# Altium PCB PCB1_1.pcbdoc
Units mil, origin at the board's own origin, x right, y up, seen from the top; angles counter-clockwise.
Board outline 1692.91 x 2440.94 mil, 2 copper layers (Top Layer, Bottom Layer), stack 62.206 mil thick; 69 components, 45 nets, 198 pads, 15 vias.
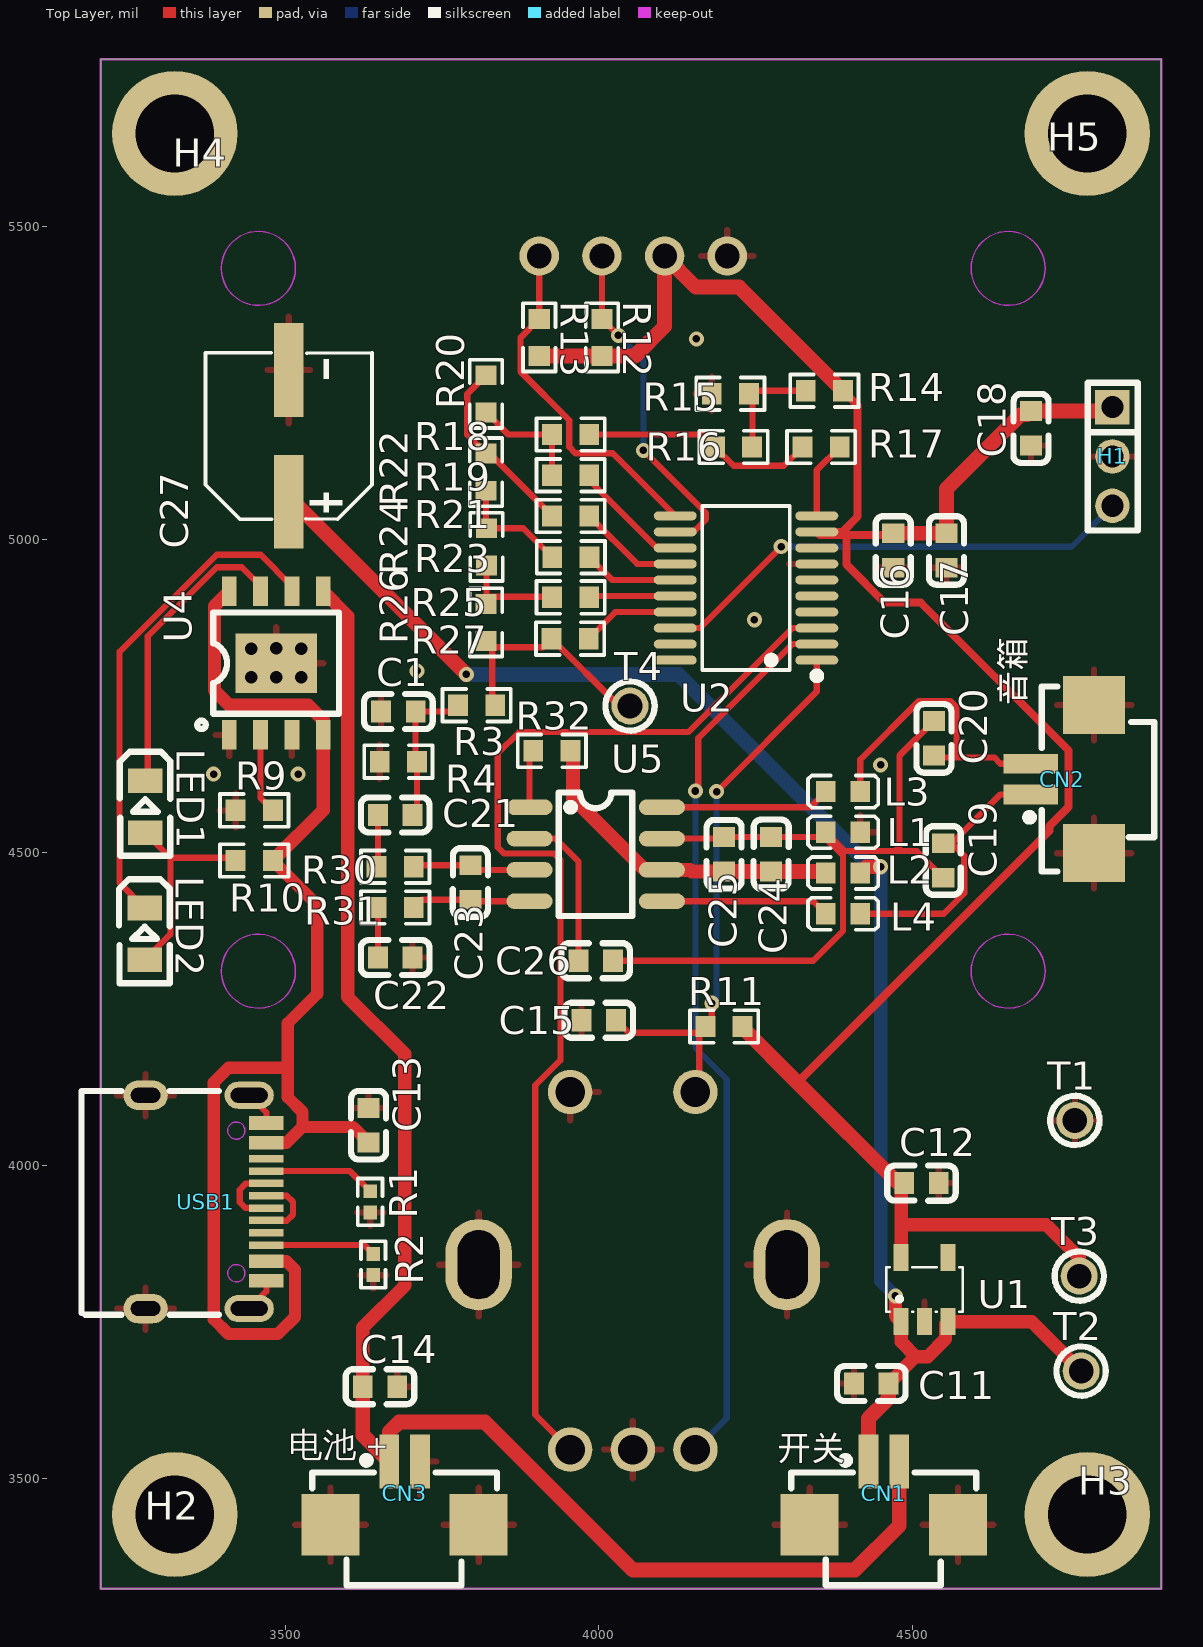
[diagram p0: Top Layer view]
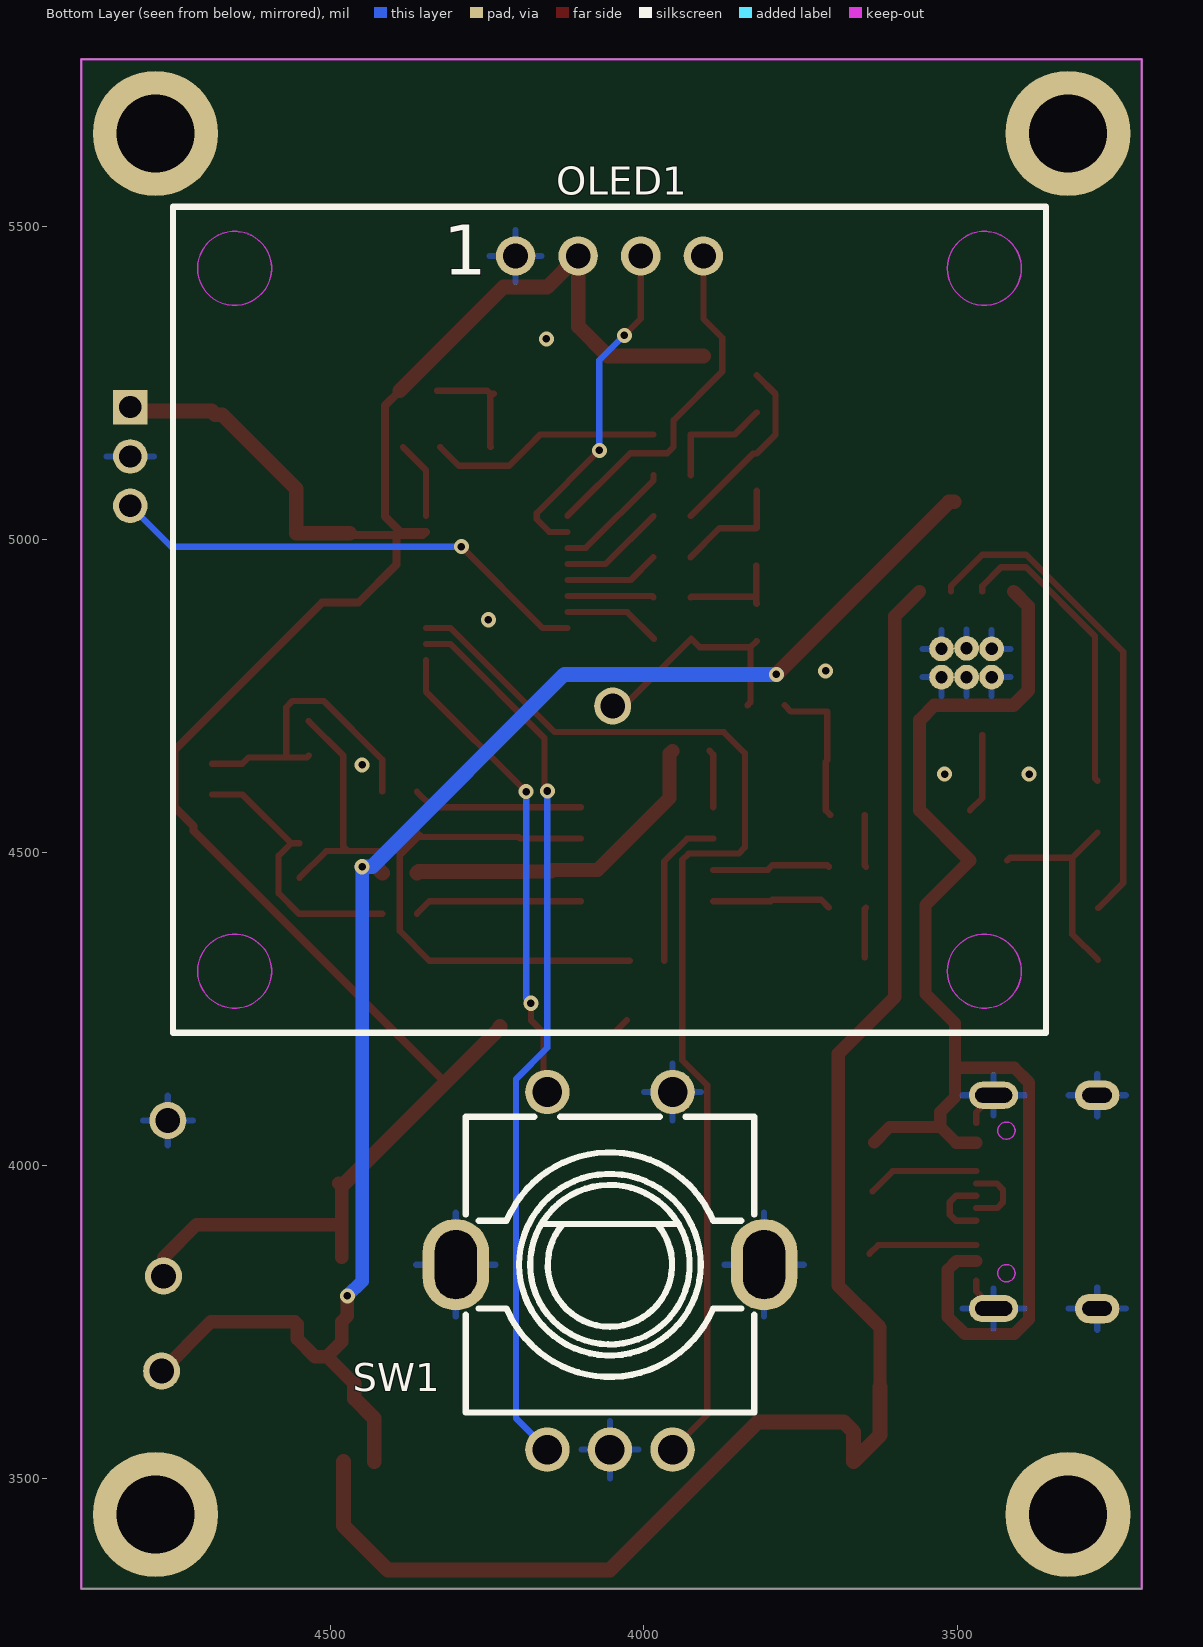
[diagram p1: Bottom Layer view, seen from below]

## Layer stack, top to bottom
Top Solder Mask Layer: solder mask 0.394, Dk 3.3
Top Layer: signal copper 1.379
Dielectric1: surface 59.449, FR4, Dk 4.5
Bottom Layer: signal copper 1.378
Bottom Solder Mask Layer: solder mask 0.394, Dk 3.3

## Board outline
3205,5765.94 4897.91,5765.94 4897.91,3325 3205,3325

## Design rules (kind name [scope] priority, off if disabled: settings)
BoardOutlineClearance copperThickness1oz [All] p0: genericclearance=10 ignorepadtopadclearanceinfootprint=FALSE except(0: Arc-SplitContinuation Track-SplitContinuation SMDPad-SplitContinuation THPad-SplitContinuation Via-SplitContinuation Fill-SplitContinuation Poly-SplitContinuation Region-SplitContinuation Text-SplitContinuation)
BoardOutlineClearance copperThickness2oz [All] p0: genericclearance=10 ignorepadtopadclearanceinfootprint=FALSE except(0: Arc-SplitContinuation Track-SplitContinuation SMDPad-SplitContinuation THPad-SplitContinuation Via-SplitContinuation Fill-SplitContinuation Poly-SplitContinuation Region-SplitContinuation Text-SplitContinuation)
BoardOutlineClearance otherClearance [All] p0: genericclearance=10 ignorepadtopadclearanceinfootprint=FALSE except(0: Arc-SplitContinuation Track-SplitContinuation SMDPad-SplitContinuation THPad-SplitContinuation Via-SplitContinuation Fill-SplitContinuation Poly-SplitContinuation Region-SplitContinuation Text-SplitContinuation)
Clearance copperThickness1oz [All] p1: gap=7 ignorepadtopadclearanceinfootprint=FALSE
Clearance copperThickness2oz [All] p1: gap=7 ignorepadtopadclearanceinfootprint=FALSE
Clearance otherClearance [All] p1: gap=7 ignorepadtopadclearanceinfootprint=FALSE
DiffPairsRouting differentialPair [All] p1: maxuncoupledlength=10 minlimit=6 maxlimit=Infinity mostfreqgap=6 toplayer_minwidth=5 toplayer_prefwidth=10 toplayer_maxwidth=100 bottomlayer_minwidth=5 bottomlayer_prefwidth=10 bottomlayer_maxwidth=100
PasteMaskExpansion pasteMaskExpansion [All] p1: expansion=0
PlaneConnect innerPlane [All] p1: planeconnectstyle=Relief reliefexpansion=20 reliefentries=4 reliefconductorwidth=10 reliefairgap=10
PolygonConnect copperRegion [All] p1: connectstyle=Relief reliefentries=4 reliefconductorwidth=10 polygonreliefangle="90 Angle" airgapwidth=10
RoutingVias viaSize [All] p1: viastyle="Through Hole" holewidth=12.0078 minholewidth=11.811 maxholewidth=248.0314 width=12.0078 minwidth=11.811 maxwidth=248.0314
SolderMaskExpansion solderMaskExpansion [IsVia] p1: useseparateexpansions=TRUE expansion=-1000 expansionbottom=-1000
SolderMaskExpansion solderMaskExpansion [All] p2: useseparateexpansions=TRUE expansion=2 expansionbottom=2
Width copperThickness1oz [All] p1: maxlimit=100 minlimit=5 preferedwidth=10
Width copperThickness2oz [All] p1: maxlimit=100 minlimit=10 preferedwidth=24

## Components (designator, comment, footprint, x,y, rotation, side; value= is the part's Value field where it differs from the comment)
C1 "100nF" C0603 3680,4725 r0 top
C11 "1μF" C0603 4435,3652.2 r0 top
C12 "1μF" C0603 4515,3972.2 r180 top
C13 "1μF" C0603 3632.44,4064.64 r270 top
C14 "1μF" C0603 3650.63,3647.2 r180 top
C15 "100nF" C0603 4000,4232.2 r0 top
C16 "100nF" C0603 4470,4982.2 r90 top
C17 "100nF" C0603 4555,4982.2 r90 top
C18 "100nF" C0603_1 4690,5177.2 r90 top
C19 "1nF" C0402 4550,4487.2 r90 top
C20 "1nF" C0402 4535,4682.2 r270 top
C21 "100nF" C0603 3675,4560 r180 top
C22 "100nF" C0603 3675,4332.2 r180 top
C23 "22pF" C0402_2 3795,4452.2 r90 top
C24 "22uF" C0603_1 4275,4497.2 r270 top
C25 "100nF" C0603 4200,4497.2 r90 top
C26 "100nF" C0603 3995,4327.2 r180 top
C27 "100UF" CAP-SMD_BD6.3-L6.6-W6.6-FD-1 3505,5165 r90 top
CN1 "HC-1.25-2PWT" CONN-SMD_2P-P1.25-HC-1.25-2PWT 4455,3477.2 r0 top
CN2 "HC-1.25-2PWT" CONN-SMD_2P-P1.25-HC-1.25-2PWT 4740,4617.2 r90 top
CN3 "HC-1.25-2PWT" CONN-SMD_2P-P1.25-HC-1.25-2PWT 3690,3477.2 r0 top
H1 "PZ200V-11-03P" HDR-TH_3P-P2.00-V-M 4820,5132.2 r270 top
H2 "M3" ? 3333.11,3443.11 r0 top
H3 "M3" ? 4789.8,3443.11 r0 top
H4 "M3" ? 3333.11,5647.83 r0 top
H5 "M3" ? 4789.8,5647.83 r0 top
L1 "BLM18PG121SN1D" L0603 4390,4532.2 r0 top
L2 "BLM18PG121SN1D" L0603 4390,4467.2 r0 top
L3 "BLM18PG121SN1D" L0603 4390,4597.2 r0 top
L4 "BLM18PG121SN1D" L0603 4390,4402.2 r0 top
LED1 "RED" LED0805-R-RD 3276.1,4573.1 r270 top
LED2 "GREEN" LED0805-R-RD 3275,4369.9 r270 top
OLED1 "HS13L03W2C01" OLED-TH_L35.4-W33.5_HS13L03W2C01 4055,5452.2 r180 bottom locked
R1 "5.1kΩ" R0402 3635,3942.2 r90 top
R2 "5.1kΩ" R0402 3640,3842.2 r90 top
R3 "10K" R0603 3805,4735 r180 top
R4 "2.1K" R0603 3680,4645 r0 top
R9 "1.2kΩ" R0603 3450,4567.2 r180 top
R10 "1K" R0603 3450,4487.2 r180 top
R11 "10K" R0603 4200,4222.2 r0 top
R12 "10K" R0603 4005,5322.2 r270 top
R13 "10K" R0603 3905,5322.2 r270 top
R14 "10K" R0603 4360,5237.2 r0 top
R15 "10K" R0603 4210,5232.2 r0 top
R16 "10K" R0603 4215,5147.2 r180 top locked
R17 "10K" R0603 4355,5147.2 r0 top locked
R18 "10K" R0603 3955,5167.2 r180 top locked
R19 "10K" R0603 3955,5102.2 r0 top locked
R20 "10K" R0603 3820,5232.2 r90 top locked
R21 "10K" R0603 3955,5037.2 r0 top locked
R22 "10K" R0603 3820,5107.2 r90 top locked
R23 "10K" R0603 3955.32,4971.35 r180 top locked
R24 "10K" R0603 3820.63,4987.88 r270 top locked
R25 "10K" R0603 3955,4907.2 r0 top locked
R26 "10K" R0603 3820,4867.2 r90 top locked
R27 "10K" R0603 3954.31,4841.35 r0 top locked
R30 "30kΩ" R0603 3675,4477.2 r180 top
R31 "30kΩ" R0603 3675,4412.2 r180 top
R32 "10K" R0603 3925,4662.2 r0 top
SW1 "EC11E1834403" SW-TH_EC11E1820402 4054.27,3832.2 r180 bottom locked
T1 "GND" TP-TH-1.5mm 4760,4072.2 r0 top
T2 "GND" TP-TH-1.5mm 4770,3672.2 r0 top
T3 "GND" TP-TH-1.5mm 4766.93,3823.78 r0 top
T4 "GND" TP-TH-1.5mm 4049.84,4733.79 r0 top
U1 "ME6217C33M5G" SOT-23-5_L3.0-W1.7-P0.95-LS2.8-BR 4520,3802.2 r270 top
U2 "CH32V003F4P6" TSSOP-20_L6.5-W4.4-P0.65-LS6.4-BL 4235,4922.2 r90 top locked
U4 "TP4056" ESOP-8_L4.9-W3.9-P1.27-LS6.0-BL-EP 3485,4802.2 r0 top
U5 "NS4150C" SOP-8_L4.9-W3.9-P1.27-LS6.0-BL 3995,4497.2 r270 top
USB1 "TYPE-C 16PIN 2MD(073)" USB-C-SMD_TYPE-C-6PIN-2MD-073_EX 3370,3942.2 r270 top

## Footprints (in the part's own frame and the unit in brackets; to place one, negate y for a bottom-side part, rotate by r counter-clockwise, add the part's x,y. Pads: shape width x height; smd on the part's side, far side on the other; paste and mask are expansions set on the pad)
C0402 [mm]
  rect 0.8x0.9 smd: 1(-0.7,0) 2(0.7,0)
  silkscreen extent -1.39,-0.71 1.39,0.71
C0402_2 [mm]
  rect 0.8x0.9 smd: 1(-0.7,0) 2(0.7,0)
  silkscreen extent -1.39,-0.71 1.39,0.71
C0603 [mm]
  rect 0.8x0.9 smd: 1(-0.7,0) 2(0.7,0)
  silkscreen extent -1.39,-0.71 1.39,0.71
C0603_1 [mm]
  rect 0.8x0.9 smd: 1(-0.7,0) 2(0.7,0)
  silkscreen extent -1.41,-0.71 1.39,0.72
CAP-SMD_BD6.3-L6.6-W6.6-FD-1 [mm]
  rect 3.8x1.2 smd: 1(-2.67,0) 2(2.67,0)
  silkscreen extent -3.38,-3.38 3.38,3.38
CONN-SMD_2P-P1.25-HC-1.25-2PWT [mm]
  rect 0.8x2.2 smd paste+0 mask+0.05: 1(-0.625,1.285) 2(0.625,1.285)
  rect 2.35x2.5 smd paste+0 mask+0.05: 3(-3.005,-1.285) 4(3.005,-1.285)
  silkscreen extent -3.75,-3.73 3.75,1.48
ESOP-8_L4.9-W3.9-P1.27-LS6.0-BL-EP [mm]
  rect 0.6x1.2 smd: 1(-1.905,-2.908) 2(-0.635,-2.908) 3(0.635,-2.908) 4(1.905,-2.908) 5(1.905,2.908) 6(0.635,2.908) 7(-0.635,2.908) 8(-1.905,2.908)
  rect 3.3x2.4 smd: 9(0,0)
  silkscreen extent -3.2,-2.67 2.55,2.05
HDR-TH_3P-P2.00-V-M [mm]
  rect 1.4x1.4 hole 0.9: 1(-2,0)
  round 1.4 hole 0.9: 2(0,0) 3(2,0)
  silkscreen extent -2.99,-1 3,1.03
L0603 [mm]
  rect 0.8x0.864 smd paste-100 mask+0.051: 1(-0.7,0) 2(0.7,0)
  silkscreen extent -1.42,-0.65 1.42,0.65
LED0805-R-RD [mm]
  rect 1x1.4 smd: 1(1.05,0) 2(-1.05,0)
  silkscreen extent -2.22,-1.04 1.99,1.01
OLED-TH_L35.4-W33.5_HS13L03W2C01 [mm]
  round 1.6 hole 1: 1(-3.81,0) 2(-1.27,0) 3(1.27,0) 4(3.81,0)
  Board Outline Layer circle w0.003: c-15.2,-0.5 r1.5
  Board Outline Layer circle w0.003: c15.2,-0.5 r1.5
  Board Outline Layer circle w0.003: c-15.2,-29 r1.5
  Board Outline Layer circle w0.003: c15.2,-29 r1.5
  Board Outline Layer region: -16.7,-0.5 -16.551,-1.151 -16.135,-1.673 -15.534,-1.963 -14.866,-1.963 -14.265,-1.673 -13.848,-1.151 -13.7,-0.5 -13.7,-0.5 -13.848,0.151 -14.265,0.673 -14.866,0.962 -15.534,0.962 -16.135,0.673 -16.551,0.151 -16.7,-0.5
  Board Outline Layer region: -16.7,-0.5 -16.551,-1.151 -16.135,-1.673 -15.534,-1.963 -14.866,-1.963 -14.265,-1.673 -13.848,-1.151 -13.7,-0.5 -13.7,-0.5 -13.848,0.151 -14.265,0.673 -14.866,0.962 -15.534,0.962 -16.135,0.673 -16.551,0.151 -16.7,-0.5
  Board Outline Layer region: 13.7,-0.5 13.848,-1.151 14.265,-1.673 14.866,-1.963 15.534,-1.963 16.135,-1.673 16.551,-1.151 16.7,-0.5 16.7,-0.5 16.551,0.151 16.135,0.673 15.534,0.962 14.866,0.962 14.265,0.673 13.848,0.151 13.7,-0.5
  Board Outline Layer region: 13.7,-0.5 13.848,-1.151 14.265,-1.673 14.866,-1.963 15.534,-1.963 16.135,-1.673 16.551,-1.151 16.7,-0.5 16.7,-0.5 16.551,0.151 16.135,0.673 15.534,0.962 14.866,0.962 14.265,0.673 13.848,0.151 13.7,-0.5
  Board Outline Layer region: -16.7,-29 -16.551,-29.651 -16.135,-30.173 -15.534,-30.462 -14.866,-30.462 -14.265,-30.173 -13.848,-29.651 -13.7,-29 -13.7,-29 -13.848,-28.349 -14.265,-27.827 -14.866,-27.538 -15.534,-27.538 -16.135,-27.827 -16.551,-28.349 -16.7,-29
  Board Outline Layer region: -16.7,-29 -16.551,-29.651 -16.135,-30.173 -15.534,-30.462 -14.866,-30.462 -14.265,-30.173 -13.848,-29.651 -13.7,-29 -13.7,-29 -13.848,-28.349 -14.265,-27.827 -14.866,-27.538 -15.534,-27.538 -16.135,-27.827 -16.551,-28.349 -16.7,-29
  Board Outline Layer region: 13.7,-29 13.848,-29.651 14.265,-30.173 14.866,-30.462 15.534,-30.462 16.135,-30.173 16.551,-29.651 16.7,-29 16.7,-29 16.551,-28.349 16.135,-27.827 15.534,-27.538 14.866,-27.538 14.265,-27.827 13.848,-28.349 13.7,-29
  Board Outline Layer region: 13.7,-29 13.848,-29.651 14.265,-30.173 14.866,-30.462 15.534,-30.462 16.135,-30.173 16.551,-29.651 16.7,-29 16.7,-29 16.551,-28.349 16.135,-27.827 15.534,-27.538 14.866,-27.538 14.265,-27.827 13.848,-28.349 13.7,-29
  silkscreen extent -17.7,-31.5 17.7,2
R0402 [mm]
  rect 0.566x0.54 smd paste-100 mask+0.051: 1(-0.433,0) 2(0.433,0)
  silkscreen extent -0.94,-0.5 0.94,0.5
R0603 [mil]
  rect 31.75x34.02 smd paste-3937.01 mask+2: 1(-29.66,0) 2(29.66,0)
  silkscreen extent -55,-26 55,26
SOP-8_L4.9-W3.9-P1.27-LS6.0-BL [mm]
  oval 0.63x1.865 smd: 1(-1.905,-2.682) 2(-0.635,-2.682) 3(0.635,-2.682) 4(1.905,-2.682) 5(1.905,2.682) 6(0.635,2.682) 7(-0.635,2.682) 8(-1.905,2.682)
  silkscreen extent -2.5,-1.5 2.5,1.48
SOT-23-5_L3.0-W1.7-P0.95-LS2.8-BR [mm]
  rect 1.1x0.6 smd: 1(1.3,-0.95) 2(1.3,0) 3(1.3,0.95) 4(-1.3,0.95) 5(-1.3,-0.95)
  silkscreen extent -0.9,-1.55 0.9,1.55
SW-TH_EC11E1820402 [mm]
  round 1.8 hole 1.2: A(-2.54,-7.25) B(2.54,-7.25) C(0,-7.25) D(-2.54,7.25) E(2.54,7.25)
  oval 2.7x3.7 hole 1.7 slot 2.8 at 90 deg: F(6.25,0.25) G(-6.25,0.25)
  silkscreen extent -5.85,-5.75 5.85,6.25
TP-TH-1.5mm [mm]
  round 1.5 hole 1: 1(0,0)
  silkscreen extent -1,-1 1,1
TSSOP-20_L6.5-W4.4-P0.65-LS6.4-BL [mil]
  oval 14.33x68.58 smd: 1(-115.16,-113.03) 2(-89.57,-113.03) 3(-63.98,-113.03) 4(-38.39,-113.03) 5(-12.79,-113.03) 6(12.8,-113.03) 7(38.39,-113.03) 8(63.98,-113.03) 9(89.57,-113.03) 10(115.16,-113.03) 11(115.16,113.03) 12(89.57,113.03) 13(63.98,113.03) 14(38.39,113.03) 15(12.8,113.03) 16(-12.79,113.03) 17(-38.39,113.03) 18(-63.98,113.03) 19(-89.57,113.03) 20(-115.16,113.03)
  silkscreen extent -146,-119 131,70
USB-C-SMD_TYPE-C-6PIN-2MD-073_EX [mm]
  rect 0.55x1.4 smd paste-100 mask+0.05: 1(-3.2,2.523) 2(-2.4,2.523) 11(2.4,2.523) 12(3.2,2.523)
  rect 0.3x1.4 smd paste-100 mask+0.05: 3(-1.75,2.523) 4(-1.25,2.523) 5(-0.75,2.523) 6(-0.25,2.523) 7(0.25,2.523) 8(0.75,2.523) 9(1.25,2.523) 10(1.75,2.523)
  oval 1.2x1.8 hole 0.6 slot 1.2 at 90 deg paste+0 mask+0.05: 13(-4.325,-2.375) 14(4.325,-2.375)
  oval 1.1x2 hole 0.6 slot 1.5 at 90 deg paste+0 mask+0.05: 13(-4.325,1.825) 14(4.325,1.825)
  Board Outline Layer circle w0.003: c-2.89,1.305 r0.35
  Board Outline Layer circle w0.003: c2.89,1.305 r0.35
  Board Outline Layer region: -2.89,1.655 -2.738,1.62 -2.616,1.523 -2.549,1.383 -2.549,1.227 -2.616,1.087 -2.738,0.99 -2.89,0.955 -2.89,0.955 -3.042,0.99 -3.164,1.087 -3.231,1.227 -3.231,1.383 -3.164,1.523 -3.042,1.62 -2.89,1.655
  Board Outline Layer region: -2.89,1.655 -2.738,1.62 -2.616,1.523 -2.549,1.383 -2.549,1.227 -2.616,1.087 -2.738,0.99 -2.89,0.955 -2.89,0.955 -3.042,0.99 -3.164,1.087 -3.231,1.227 -3.231,1.383 -3.164,1.523 -3.042,1.62 -2.89,1.655
  Board Outline Layer region: 2.89,1.655 3.042,1.62 3.164,1.523 3.231,1.383 3.231,1.227 3.164,1.087 3.042,0.99 2.89,0.955 2.89,0.955 2.738,0.99 2.616,1.087 2.549,1.227 2.549,1.383 2.616,1.523 2.738,1.62 2.89,1.655
  Board Outline Layer region: 2.89,1.655 3.042,1.62 3.164,1.523 3.231,1.383 3.231,1.227 3.164,1.087 3.042,0.99 2.89,0.955 2.89,0.955 2.738,0.99 2.616,1.087 2.549,1.227 2.549,1.383 2.616,1.523 2.738,1.62 2.89,1.655
  silkscreen extent -4.5,-4.97 4.57,0.6
? [mil]
  round 200 hole 125: 1(-10,0)

## Free pads (board coordinates)
  round 39.37 hole 19.68: 1(3445,4780) 1(3445,4825) 1(3485,4780) 1(3485,4825.85) 1(3525,4780) 1(3525,4825)

## Via types
v1: diameter 24.02, hole 12.01, Top Layer to Bottom Layer, 15 vias

## Nets (pads, with @x,y where several pads share a name; then routed paths per layer and width w, separated by ;. In a path a pad name is that pad's centre, name@x,y a point inside that pad or via, vN(x,y) a via of type N, cw(c..) or ccw(c..) an arc to the next point about the centre after c; other vN are vias at no path point)
3V3: C12.2 C16.2 C17.2 C18.2 H1.1 OLED1.2 R11.2 R12.2 R13.2 R14.2 T3.1 U1.5 U2.9 | length 3641.6
  Top Layer w12.9: 4317.24,4132.72 4719.23,4534.7 4719.23,4542.19 4749.6,4572.56 4749.6,4663.12 4514,4898.73 4456.03,4898.73 4395.27,4959.49 4395.27,5006.73 ; R14.2 4413.28,5213.58 4413.28,5036.29 4388.77,5011.78 U2.9 4353.08,5006.73 4395.27,5006.73 ; C16.2 4466.96,5006.73 4395.27,5006.73
  Top Layer w21.26: U1.5 4482.6,3905.65 ; C12.2 4482.6,3967.36 4482.6,3905.65 ; T3.1 4766.93,3853.07 4714.35,3905.65 4482.6,3905.65
  Top Layer w23.62: R13.2 R12.2 4057.76,5292.54 4105,5339.79 OLED1.2 4154.65,5402.56 4224.31,5402.56 R14.2 ; R11.2 4229.66,4220.3 4317.24,4132.72 C12.2@4482.6,3967.36 ; C16.2 C17.2 4555,5080.63 4673.11,5198.74 4683.98,5198.74 C18.2 4813.82,5204.77 H1.1
$1N33: R14.1 R15.2 R16.1 | length 178
  Top Layer w10: R15.2 R15.2@4245.34,5232.21 ; R16.1 4245.34,5147.88 R15.2@4245.34,5232.21 ; R14.1 4250.34,5237.21 R15.2@4245.34,5232.21
$1N35: R16.2 R17.1 R18.1 | length 373.8
  Top Layer w10: R18.1 4165.34,5167.21 R16.2 4215.34,5117.21 4295.34,5117.21 R17.1
$1N36: R18.2 R19.1 R20.1 | length 185
  Top Layer w10: R20.1 3855.34,5167.21 R18.2 R19.1
$1N37: R20.2 R21.1 R22.2 | length 296.5
  Top Layer w10: R20.2 3790,5231.87 3790,5166.87 R22.2 3825.68,5136.87 R21.1
$1N38: R22.1 R23.2 R24.1 | length 184.4
  Top Layer w10: R22.1 3820,5018.17 R24.1 3879.46,5017.55 R23.2
$1N39: R24.2 R25.1 R26.2 | length 166.7
  Top Layer w10: R26.2 3820.63,4897.49 R26.2@3820.63,4908.22 ; R24.2 R26.2@3820.63,4908.22 ; R25.1 3924.32,4908.22 R26.2@3820.63,4908.22
$2N8: R1.2 USB1.4 | length 179
  Top Layer w10: USB1.4 3602.84,3991.41 R1.2
$2N12: R2.2 USB1.10 | length 176.5
  Top Layer w10: USB1.10 3625.95,3873.3 R2.2
$2N44: LED1.1 LED2.1 R10.2 | length 342.9
  Top Layer w10: LED2.1 3316.1,4369.65 3316.1,4491.75 ; LED1.1 3316.1,4491.75 ; R10.2 3415.79,4491.75 3316.1,4491.75
$2N47: LED1.2 U4.7 | length 479.1
  Top Layer w10: LED1.2 3280,4618.36 3280,4845.32 3390,4955.32 3430,4955.32 3460,4925.32 U4.7
$2N48: LED2.2 U4.6 | length 794.2
  Top Layer w10: LED2.2 3235,4451.25 3235,4820.32 3390,4975.32 3460,4975.32 3510,4925.32 U4.6
$2N50: R9.1 U4.2 | length 128.6
  Top Layer w10: U4.2 3460,4586.86 R9.1
$2N54: C20.2 CN2.2 L3.2 | length 487.2
  Top Layer w10: L3.2 4417.55,4648.26 4511.1,4741.81 4561.1,4741.81 4571.1,4731.81 4571.1,4651.81 ; C20.2 4537.83,4651.81 4571.1,4651.81 ; CN2.2 4641.1,4641.81 4631.1,4651.81 4571.1,4651.81
$2N55: C19.2 CN2.1 L4.2 | length 439.1
  Top Layer w10: L4.2 4550.71,4402.2 4583.27,4434.76 4583.27,4494.76 C19.2@4563.27,4514.76 ; C19.2 C19.2@4563.27,4514.76 ; CN2.1 4641.1,4592.6 C19.2@4563.27,4514.76
$2N58: L3.1 U5.8 | length 272.2
  Top Layer w10: U5.8 4337.44,4572.2 L3.1
$2N60: L4.1 U5.5 | length 270.1
  Top Layer w10: U5.5 4342.44,4422.2 L4.1
$2N62: C23.1 R31.1 U5.4 | length 190.9
  Top Layer w10: R31.1 3717.1,4424.64 C23.1 3797.44,4422.2 U5.4
$2N63: C23.2 R30.1 U5.3 | length 188.9
  Top Layer w10: R30.1 3707.22,4479.76 C23.2 3802.56,4472.2 U5.3
$2N67: C1.2 C21.1 R3.2 R4.2 | length 240.7
  Top Layer w10: C21.1 3709.66,4567.1 R4.2 3707.56,4647.1 C1.2 3765.34,4725 R3.2
$2N68: C22.2 R31.2 | length 80.9
  Top Layer w10: R31.2 3647.44,4410.1 C22.2
$2N69: C21.2 R30.2 | length 83.7
  Top Layer w10: R30.2 3647.44,4479.31 C21.2
$2N80: C26.2 U5.2 | length 251.7
  Top Layer w10: U5.2 3931.01,4522.2 3967.44,4485.77 C26.2
$2N81: R32.1 U5.1 | length 92.5
  Top Layer w10: U5.1 3889.39,4656.25 R32.1
A: SW1.A U2.2 | length 1430.6
  Top Layer w10: v1(4154.27,4598.16) 4158.74,4602.64 4158.74,4682.64 4308.74,4832.64 U2.2
  Bottom Layer w10: SW1.A 4204.27,3596.77 4204.27,4138.17 4154.27,4188.16 v1(4154.27,4598.16)
AU_GND: C19.1 C20.1 C24.1 C25.2 C26.1 L1.1 U5.7 | length 1271.6
  Top Layer w10: C26.1 4342.44,4327.2 4390,4374.76 4390,4494.76 4360,4524.76 L1.1@4355,4524.76 ; U5.7 4197.44,4522.2 C25.2 C24.1 L1.1@4355,4524.76 ; C20.1 4480,4654.76 4480,4509.76 4472.44,4502.2 ; C19.1 4507.44,4502.2 4472.44,4502.2 ; L1.1@4355,4524.76 L1.1 4392.44,4502.2 4472.44,4502.2
B: SW1.B U2.3 | length 1831.4
  Top Layer w10: SW1.B 3898.74,3602.3 3898.74,4128.23 3938.74,4168.23 3938.74,4488.23 3928.74,4498.23 3848.74,4498.23 3838.74,4508.23 3838.74,4658.23 3872.72,4692.2 4142.72,4692.2 4308.74,4858.23 U2.3
BAT-IN: C14.2 CN1.2 CN3.1 U4.5 | length 2585.5
  Top Layer w21.26: U4.5 3599.45,4877.25 3599.45,4269.25 3690,4178.7 3690,3808.62 3623.07,3741.69 C14.2
  Top Layer w23.62: C14.2 3623.07,3570.12 CN3.1 3665.39,3575.04 3681.14,3590.79 3818.19,3590.79 4054.41,3354.57 4408.74,3354.57 4479.61,3425.43 CN1.2
BIT0: R17.2 U2.10 | length 125
  Top Layer w10: U2.10 4348.03,5110.58 R17.2
BIT1: R19.2 U2.13 | length 190.1
  Top Layer w10: R19.2 3984.66,5094.2 4092.68,4986.19 U2.13
BIT2: R21.2 U2.14 | length 169
  Top Layer w10: R21.2 4061.27,4960.6 U2.14
BIT3: R23.1 U2.15 | length 152
  Top Layer w10: R23.1 4021.32,4935.01 U2.15
BIT4: R25.2 U2.16 | length 138.2
  Top Layer w10: R25.2 3986.87,4909.42 U2.16
BIT5: R27.2 U2.17 | length 155.6
  Top Layer w10: R27.2 4026.44,4883.82 U2.17
D: C15.2 R11.1 SW1.D U2.1 | length 910.7
  Top Layer w10: C15.2 4047.56,4212.2 R11.1@4160.34,4212.2 ; SW1.D 4160.34,4123.71 R11.1@4160.34,4212.2 ; v1(4180.34,4259.35) 4180.34,4232.2 R11.1 R11.1@4160.34,4212.2 ; v1(4188.03,4597.05) 4348.03,4757.05 U2.1
  Bottom Layer w10: v1(4180.34,4259.35) 4188.03,4267.05 v1(4188.03,4597.05)
D+: USB1.6 USB1.8 | length 113.7
  Top Layer w10: USB1.8 3469.96,3912.05 3501.89,3912.05 3511.89,3922.05 3511.89,3942.05 3501.89,3952.05 USB1.6@3469.33,3952.05
D-: USB1.5 USB1.7 | length 113.1
  Top Layer w10: USB1.7 3436.14,3932.36 3426.77,3941.73 3426.77,3961.73 3436.77,3971.73 USB1.5
DAC: R3.1 R26.1 R27.1 T4.1 | length 378.7
  Top Layer w10: R26.1 R26.1@3830,4827.54 ; R3.1 3830,4739.66 R26.1@3830,4827.54 ; T4.1 4032.2,4733.79 R27.1 3910.84,4827.54 R26.1@3830,4827.54
DIO: H1.3 U2.18 | length 778.9
  Top Layer w10: U2.18 4161.26,4858.23 v1(4291.26,4988.23)
  Bottom Layer w10: v1(4291.26,4988.23) 4754.76,4988.23 H1.3
GND: C1.1 C11.1 C12.1 C13.1 C14.1 C15.1 C16.1 C17.1 C18.1 C22.1 C27.2 CN1.3 CN1.4 CN2.3 CN2.4 CN3.2 CN3.3 CN3.4 H1.2 L1.2 OLED1.1 pad.1 R1.1 R2.1 R4.1 R9.2 R15.1 SW1.C SW1.E SW1.F SW1.G T1.1 U1.2 U2.7 U4.1 U4.3 U4.9 USB1.1 USB1.12 USB1.13 USB1.14 | length 111.3
  Top Layer w10: USB1.14@3441.86,3771.93 3469.33,3799.41 USB1.12 ; USB1.13@3441.86,4112.48 3469.33,4085 USB1.1
  other v1: 3385,4625 3520,4625 4450,4640 3710,4790 4248.35,4871.5 4155.63,5320
SCL: OLED1.3 R12.1 U2.12 | length 546.9
  Top Layer w10: OLED1.3 R12.1 v1(4031.26,5325.61) ; v1(4071.26,5141.78) 4171.26,5041.78 4171.26,5031.78 4151.26,5011.78 U2.12
  Bottom Layer w10: v1(4031.26,5325.61) 4071.26,5285.61 v1(4071.26,5141.78)
SDA: OLED1.4 R13.1 U2.11 | length 564.3
  Top Layer w10: OLED1.4 R13.1 3875,5321.87 3875,5267.88 3952.68,5190.21 3952.68,5147.37 3962.68,5137.37 4021.97,5137.37 U2.11
VAU: C24.2 C25.1 L2.1 R32.2 U5.6 | length 530.1
  Top Layer w22.32: R32.2 3958.88,4657.99 3958.88,4587.12 4073.8,4472.2 U5.6 4145.83,4472.2 4148.39,4469.64 C25.1@4195.64,4469.64
  Top Layer w23.62: C25.1@4195.64,4469.64 C25.1 C24.2 4360,4469.64 L2.1
VBAT: C11.2 C27.1 CN1.1 L2.2 T2.1 U1.1 U1.3 | length 2560.7
  Top Layer w21.26: C11.2 4505.47,3695.11 4506.22,3695.11 ; v1(4473.5,3792.17) 4473.5,3760.11 U1.1 4482.6,3718.74 4506.22,3695.11 ; T2.1 4691.18,3751.02 U1.3 4553.46,3747.08 4553.46,3723.46 4525.12,3695.11 4506.22,3695.11
  Top Layer w23.62: C27.1 3512.88,5059.88 v1(3788.47,4784.29) ; L2.2 4427.55,4477.2 v1(4449.88,4477.2) ; CN1.1 4430.39,3596.42 4462.56,3628.58 C11.2
  Bottom Layer w21.26: v1(4449.88,4477.2) 4449.88,3815.79 v1(4473.5,3792.17)
  Bottom Layer w23.62: v1(3788.47,4784.29) 4127.05,4784.29 4434.13,4477.2 v1(4449.88,4477.2)
VBUS: C13.2 R10.1 U4.4 U4.8 USB1.2 USB1.11 | length 2069.5
  Top Layer w19.49: USB1.11 3501.07,3847.71 3514.88,3833.9 3514.88,3758.64 3487.54,3731.3 3408.8,3731.3 3385.17,3754.92 3385.17,4132.87 3408.8,4156.5 3503.28,4156.5 ; USB1.2 3501.59,4036.69 3526.91,4062.01 ; R10.1 3550.53,4416.34 3550.53,4274.61 3503.28,4227.36 3503.28,4156.5 ; C13.2 3607.52,4062.01 3526.91,4062.01 ; 3503.28,4156.5 3503.28,4109.25 3526.91,4085.63 3526.91,4062.01
  Top Layer w21.26: U4.8 3386.38,4893.08 3386.38,4758.57 3410,4734.95 3536.38,4734.95 3560,4711.33 U4.4 3560,4567.54 R10.1
pads on no net: H2.1 H3.1 H4.1 H5.1 U1.4 U2.4 U2.5 U2.6 U2.8 U2.19 U2.20 USB1.3 USB1.9

## Polygon pours and split planes (outlines as drawn)
GND on Top Layer (solid, remove dead copper, pour order 0): 3010,5855 5065,5855 5065,3175 3010,3175
GND on Bottom Layer (solid, remove dead copper, pour order 2): 3000,6020 4995,6020 4995,3000 3000,3000

## Keep-outs
Board Outline Layer:
  the board outline again, w3.94

## Silkscreen, mask and mechanical layers (free items; w line width, h text height)
Top Silkscreen Layer:
  text "音箱" at 4680,4735 h39.37 r90
  text "电池 +" at 3505,3535 h39.37
  text "开关" at 4285,3530 h39.37
3D Shell Top Layer:
  pour cut-out: 4189.8,3831.47 cw(c4055,3831.47) 3920.2,3831.47 cw(c4055,3831.47)

## Text inside footprints (layer, text, board x,y; h text height)
OLED1: Bottom Silkscreen Layer "1" at 4320.59,5421.96 h80